# Altium PCB light_clock.PcbDoc
Units mm, origin at the board's own origin, x right, y up, seen from the top; angles counter-clockwise.
Board outline 99.19 x 98.81 mm, 2 copper layers (Top Layer, Bottom Layer); 30 components, 28 nets, 147 pads, 0 vias.
Unrouted connection lines stored in the file: 77.
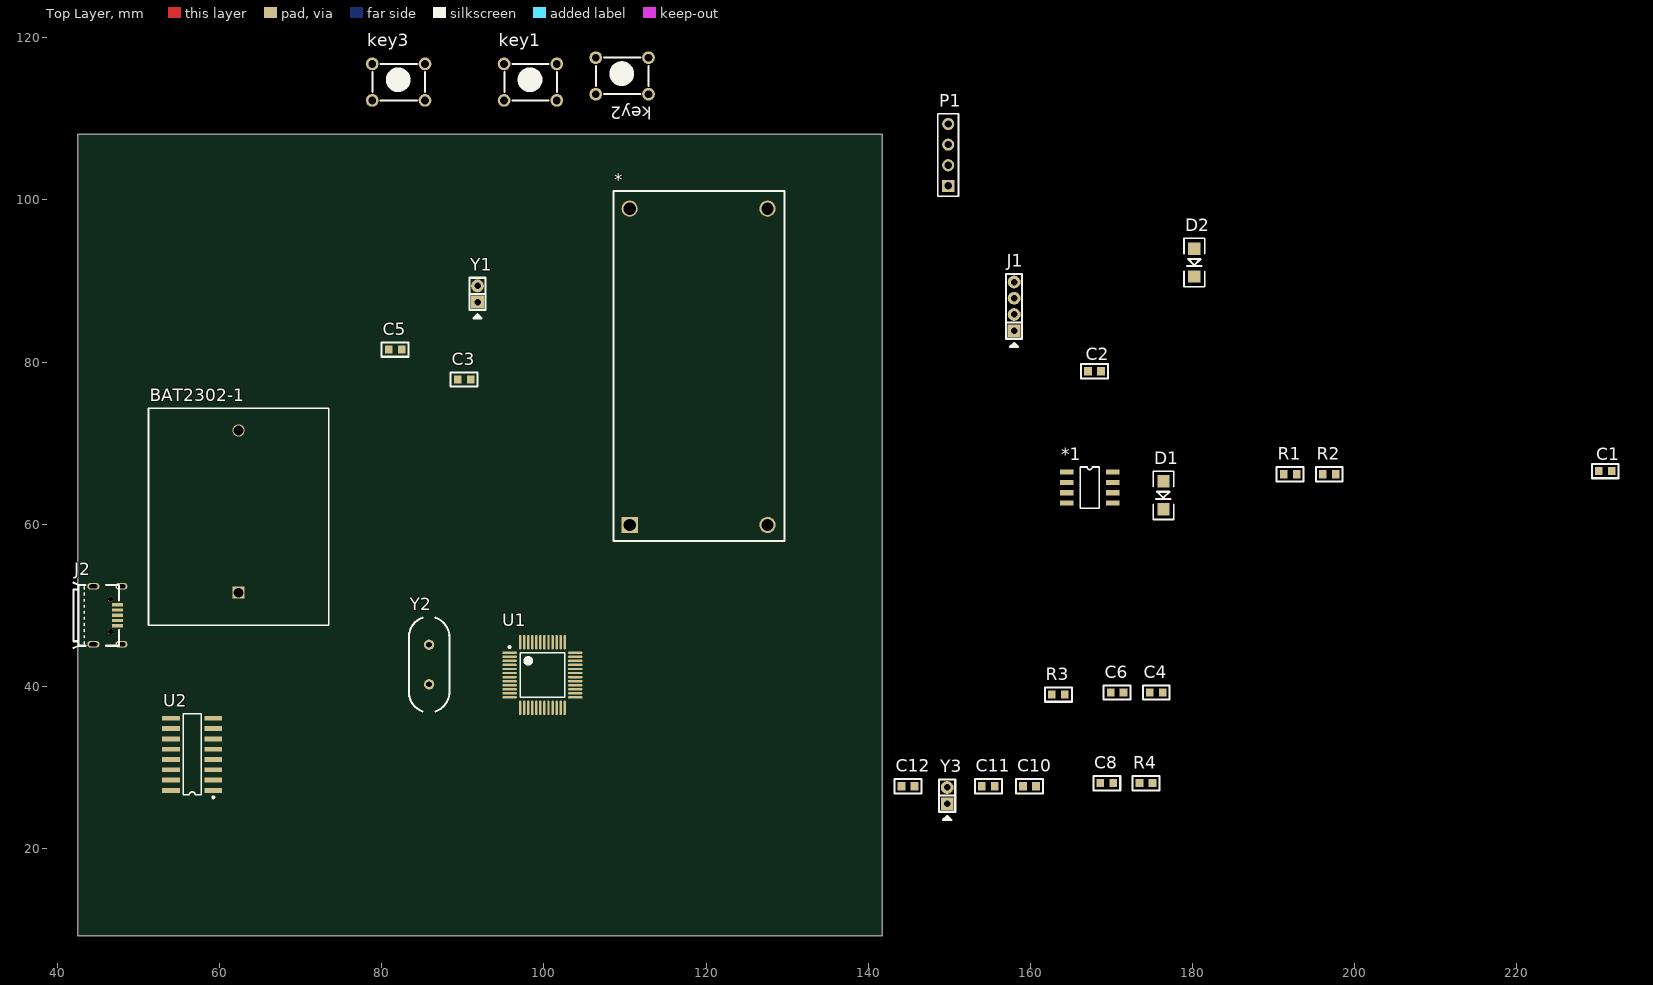
[diagram p0: Top Layer view]
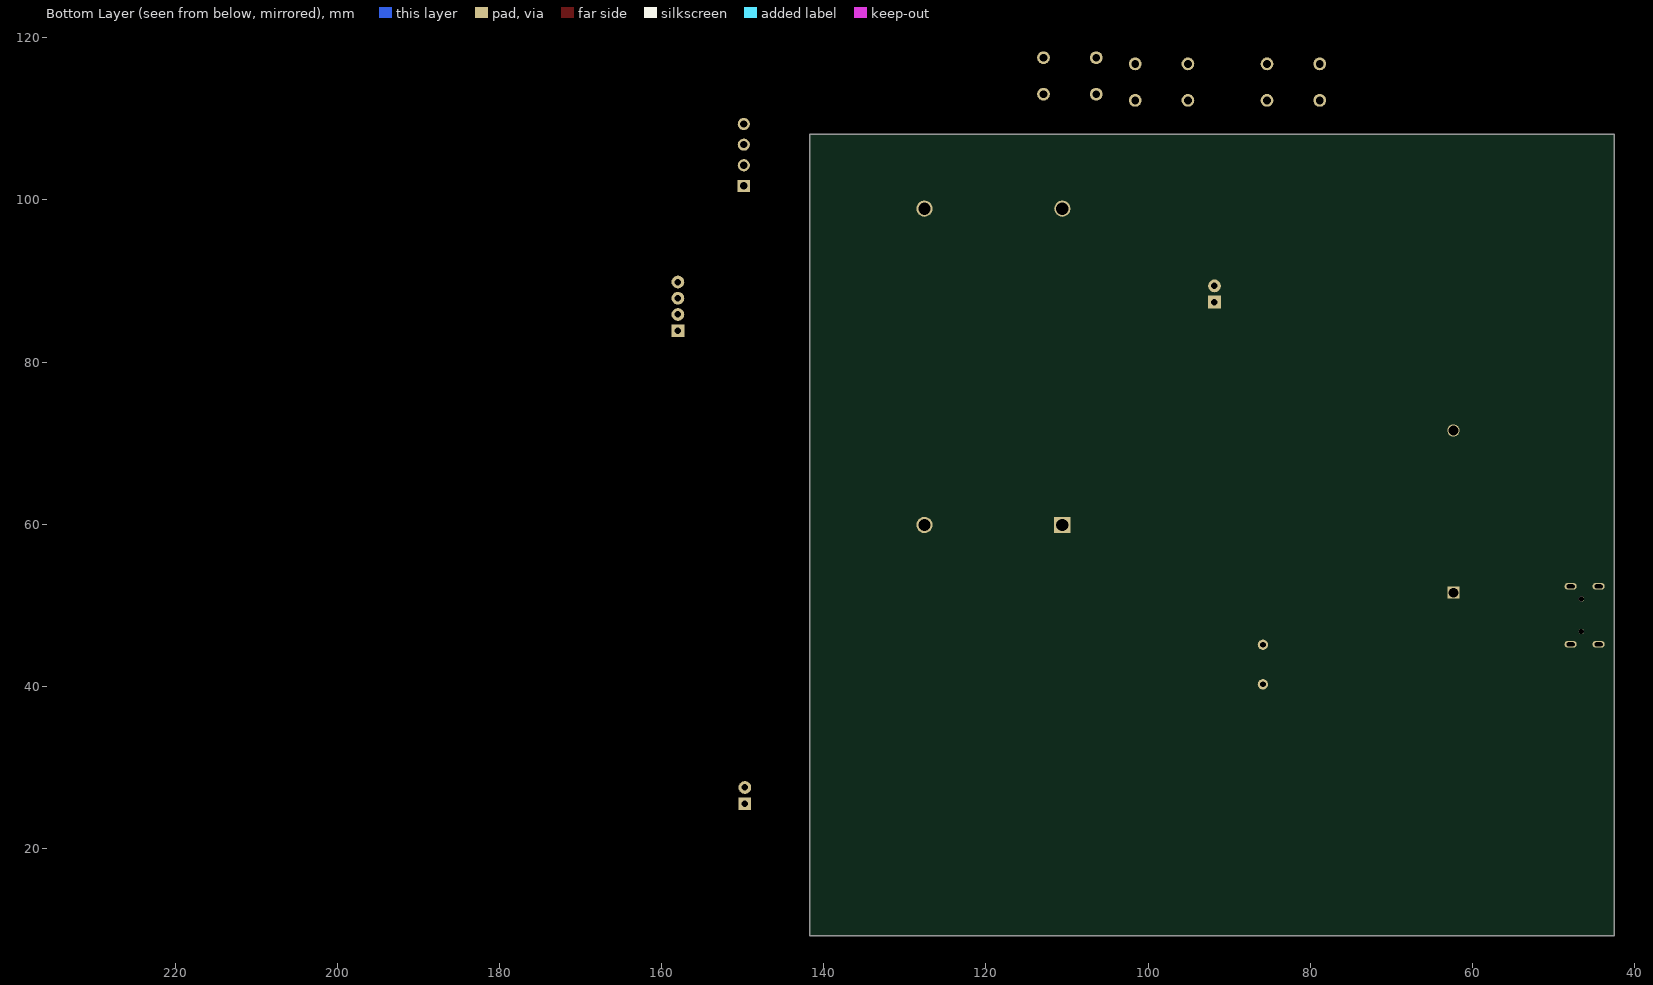
[diagram p1: Bottom Layer view, seen from below]

## Layer stack, top to bottom
Top Layer: signal copper 0.0356
Dielectric: dielectric 0.32, FR-4, Dk 4.8
Bottom Layer: signal copper 0.0356

## Board outline
42.545,9.271 42.545,108.077 141.732,108.077 141.732,9.271

## Design rules (kind name [scope] priority, off if disabled: settings)
Clearance [All] p1: gap=0.254
PolygonConnect [All] p1: connectstyle=Relief reliefconductorwidth=0.254 reliefentries=4 polygonreliefangle="90 Angle"
RoutingVias [All] p1: holewidth=0.711 width=1.27 viastyle="Through Hole" minholewidth=0.711 minwidth=1.27 maxholewidth=0.711 maxwidth=1.27
SilkscreenOverComponentPads [IsPad] p1: minsilkscreentomaskgap=0.254
SolderMaskExpansion [All] p1: expansion=0.102
Width [All] p1: maxlimit=0.254 minlimit=0.254 preferedwidth=0.254
27 further rules are at their usual default settings.

## Components (designator, comment, footprint, x,y, rotation, side; value= is the part's Value field where it differs from the comment)
* "DC-DC_ADJ" DC-DC_ADJ 108.585,57.912 r90 top
*1 "pcf8563" SOP-8 164.465,66.421 r0 top
BAT2302-1 "BAT2302" CR2302 62.357,51.562 r90 top
C1 "104" 0603 230.886,66.548 r0 top
C2 "104" 0603 167.894,78.867 r0 top
C3 "Cap" 0603 90.17,77.851 r0 top
C4 "Cap" 0603 175.514,39.243 r0 top
C5 "Cap" 0603 81.661,81.534 r0 top
C6 "Cap" 0603 170.688,39.243 r0 top
C8 "Cap" 0603 169.418,28.067 r0 top
C10 "Cap" 0603 159.893,27.686 r0 top
C11 "Cap" 0603 154.813,27.686 r0 top
C12 "Cap" 0603 144.907,27.686 r0 top
D1 "LL4148" LL4148 176.403,61.849 r90 top
D2 "LL4148" LL4148 180.213,90.551 r90 top
J1 "HDR1x4" PIN-4-2.0-0.8 157.988,86.868 r90 top
J2 "MICRO USB CONNECTOR TYPEB" "MICRO USB MK5P" 43.307,48.768 r270 top
key1 "KEY_M" KEY_weidong 101.6,112.268 r180 top
key2 "KEY_M" KEY_weidong 112.903,113.03 r180 top
key3 "KEY_M" KEY_weidong 85.344,112.268 r180 top
P1 "MHDR1X4" HDR1X4 149.86,101.727 r90 top
R1 "10k" 0603 192.024,66.167 r0 top
R2 "10k" 0603 196.85,66.167 r0 top
R3 "10k" 0603 163.449,38.989 r0 top
R4 "10k" 0603 174.244,28.067 r0 top
U1 "STM32F103C8T6" STM-LQFP48_N 99.822,41.402 r0 top
U2 "CH340G" SOP16M 56.642,31.623 r90 top
Y1 "32.768KHz" PIN-2-2.0-0.8 91.821,88.392 r90 top
Y2 "8MHz" XTAL_US 85.852,40.259 r90 top
Y3 "12MHz" PIN-2-2.0-0.8 149.733,26.543 r90 top

## Footprints (in the part's own frame and the unit in brackets; to place one, negate y for a bottom-side part, rotate by r counter-clockwise, add the part's x,y. Pads: shape width x height; smd on the part's side, far side on the other; paste and mask are expansions set on the pad)
0603 [mm] "SMD, 0603"
  rect 0.95x1 smd: 1(-0.8,0) 2(0.8,0)
  silkscreen extent -1.66,-0.88 1.66,0.88, body extent -0.77,-0.43 0.77,0.43, height 0.45
CR2302 [mm]
  rect 1.5x1.5 hole 1.2: 1(0,0)
  round 1.5 hole 1.2: 2(20,0)
  silkscreen extent -4,-11.1 22.73,11.1
DC-DC_ADJ [mm] "DC-DC_ADJ"
  rect 2x2 hole 1.5: 1(2,-2)
  round 2 hole 1.5: 2(2,-19) 3(41,-19) 4(41,-2)
  silkscreen extent 0,-21.1 43.2,0
HDR1X4 [mm]
  rect 1.5x1.5 hole 0.889: 1(0,0)
  round 1.5 hole 0.889: 2(2.54,0) 3(5.08,0) 4(7.62,0)
  silkscreen extent -1.27,-1.27 8.89,1.27
KEY_weidong [mil]
  round 62 hole 38: 1(0,0) 1(255.91,0) 2(0,-177.17) 2(255.91,-177.17)
  silkscreen extent 0,-177 255,0
LL4148 [mil]
  rect 60x60 smd: 1(0,0) 2(135,0)
  silkscreen extent -50,-50 185,50
"MICRO USB MK5P" [mm] "MICRO USB MK5P"
  round 0.65 hole 0.65 unplated: 0(-2,3.28) 0(2,3.28)
  rect 0.4x1.35 smd: 1(-1.3,4.125) 2(-0.65,4.125) 3(0,4.125) 4(0.65,4.125) 5(1.3,4.125)
  rrect100% 0.8x1.5 hole 0.45 slot 1 at 90 deg: 6(-3.575,1.15) 7(3.575,1.15) 8(3.575,4.6) 9(-3.575,4.6)
  silkscreen extent -4.05,-1.33 4.05,4.3
PIN-2-2.0-0.8 [mm] "Pin Head"
  rect 1.575x1.575 hole 0.8: 1(-1,0)
  round 1.575 hole 0.8: 2(1,0)
  silkscreen extent -3.01,-1 2,1, body extent -2,-1 2,1, height 5.31
PIN-4-2.0-0.8 [mm] "Pin Header"
  rect 1.575x1.575 hole 0.8: 1(-3,0)
  round 1.575 hole 0.8: 2(-1,0) 3(1,0) 4(3,0)
  silkscreen extent -5.01,-1 4,1, body extent -4,-1 4,1, height 5.31
SOP16M [mm]
  rect 0.6x2.2 smd: 1(-4.445,-2.6) 2(-3.175,-2.6) 3(-1.905,-2.6) 4(-0.635,-2.6) 5(0.635,-2.6) 6(1.905,-2.6) 7(3.175,-2.6) 8(4.445,-2.6) 9(4.445,2.6) 10(3.175,2.6) 11(1.905,2.6) 12(0.635,2.6) 13(-0.635,2.6) 14(-1.905,2.6) 15(-3.175,2.6) 16(-4.445,2.6)
  silkscreen extent -5.42,-2.72 5,1.1
SOP-8 [mil]
  rect 65x25 smd: 1(0,0) 2(0,-50) 3(0,-100) 4(0,-150) 5(224.41,-150) 6(224.41,-100) 7(224.41,-50) 8(224.41,0)
  silkscreen extent 65,-175 159,25
STM-LQFP48_N [mm] "QFP, 48-Leads, Body 7x7mm, Pitch 0.5mm, IPC Medium Density"
  oval 1.8x0.3 smd: 1(-4.05,2.75) 2(-4.05,2.25) 3(-4.05,1.75) 4(-4.05,1.25) 5(-4.05,0.75) 6(-4.05,0.25) 7(-4.05,-0.25) 8(-4.05,-0.75) 9(-4.05,-1.25) 10(-4.05,-1.75) 11(-4.05,-2.25) 12(-4.05,-2.75) 25(4.05,-2.75) 26(4.05,-2.25) 27(4.05,-1.75) 28(4.05,-1.25) 29(4.05,-0.75) 30(4.05,-0.25) 31(4.05,0.25) 32(4.05,0.75) 33(4.05,1.25) 34(4.05,1.75) 35(4.05,2.25) 36(4.05,2.75)
  oval 0.3x1.8 smd: 13(-2.75,-4.05) 14(-2.25,-4.05) 15(-1.75,-4.05) 16(-1.25,-4.05) 17(-0.75,-4.05) 18(-0.25,-4.05) 19(0.25,-4.05) 20(0.75,-4.05) 21(1.25,-4.05) 22(1.75,-4.05) 23(2.25,-4.05) 24(2.75,-4.05) 37(2.75,4.05) 38(2.25,4.05) 39(1.75,4.05) 40(1.25,4.05) 41(0.75,4.05) 42(0.25,4.05) 43(-0.25,4.05) 44(-0.75,4.05) 45(-1.25,4.05) 46(-1.75,4.05) 47(-2.25,4.05) 48(-2.75,4.05)
  silkscreen extent -4.17,-2.75 2.75,3.57, body extent -3.5,-3.5 3.5,3.5, height 1.6
XTAL_US [mil]
  round 50 hole 28: 1(0,0) 2(192.13,0)
  silkscreen extent -131,-98 323,98

## Part data
C1 C2: library part C
C3 C4 C5 C6 C8 C10 C11 C12: "Capacitor"
J1: "Connector"
J2: "USB Connector"
P1: "Header, 4-Pin"
R1 R2 R3 R4: library part R
U1: "STM32 ARM-based 32-bit MCU with 64 Kbytes Flash, 48-pin LQFP, Industrial Temperature"
U2: "USB2UA"
Y1 Y3: library part XTAL, "Crystal Oscillator"
Y2: library part XTAL, "Crystal Oscillat"

## Nets (pads, with @x,y where several pads share a name; then routed paths per layer and width w, separated by ;. In a path a pad name is that pad's centre, name@x,y a point inside that pad or via, vN(x,y) a via of type N, cw(c..) or ccw(c..) an arc to the next point about the centre after c; other vN are vias at no path point)
5V: *.1 J2.1
BOOT0: R4.2 U1.44
CLK: P1.3 R1.1 U1.37
DIO: P1.2 R2.1 U1.34
GND: *1.4 *.2 *.4 BAT2302-1.1 C1.1 C2.1 C3.1 C4.1 C5.1 C6.1 C8.1 C10.2 C11.1 C12.1 J1.4 J2.5 key1.2 key2.2 key3.2 P1.1 R4.1 U1.8 U1.23 U1.35 U1.47 U2.1
Net*1_1: *1.1 C5.2 Y1.2
Net*1_2: *1.2 C6.2 Y1.1
Net*1_5: *1.5 C2.2 D1.1 D2.1
NetBAT2302-1_2: BAT2302-1.2 D2.2
NetC3_2: C3.2 U1.5 Y2.2
NetC4_2: C4.2 U1.6 Y2.1
NetC10_1: C10.1 U2.4
NetC11_2: C11.2 U2.7 Y3.2
NetC12_2: C12.2 U2.8 Y3.1
NRST: C8.2 R3.1 U1.7
PA4-KEY1: key1.1 U1.14
PA5-KEY1: U1.15
PA5KEY1: key2.1
PA6-KEY1: key3.1 U1.16
RX-A3: J1.3 U1.13
SCL_8563: *1.7
SDA_8563: *1.8
TX-A2: J1.2 U1.12
UART1_RX: U1.30 U2.2
UART1_TX: U1.31 U2.3
USB_D+: J2.3 U2.5
USB_D-: J2.2 U2.6
VCC: *.3 C1.2 D1.2 J1.1 P1.4 R1.2 R2.2 R3.2 U1.1 U1.9 U1.24 U1.36 U1.48 U2.16
pads on no net: *1.3 *1.6 J2.0 J2.4 J2.6 J2.7 J2.8 J2.9 U1.2 U1.3 U1.4 U1.10 U1.11 U1.17 U1.18 U1.19 U1.20 U1.21 U1.22 U1.25 U1.26 U1.27 U1.28 U1.29 U1.32 U1.33 U1.38 U1.39 U1.40 U1.41 U1.42 U1.43 U1.45 U1.46 U2.9 U2.10 U2.11 U2.12 U2.13 U2.14 U2.15